# Altium PCB IMU V1.PcbDoc (part 1 of 2)
Units mm, origin at the board's own origin, x right, y up, seen from the top; angles counter-clockwise.
Board outline 100 x 100 mm, 2 copper layers (Top Layer, Bottom Layer); 99 components, 85 nets, 461 pads, 189 vias.
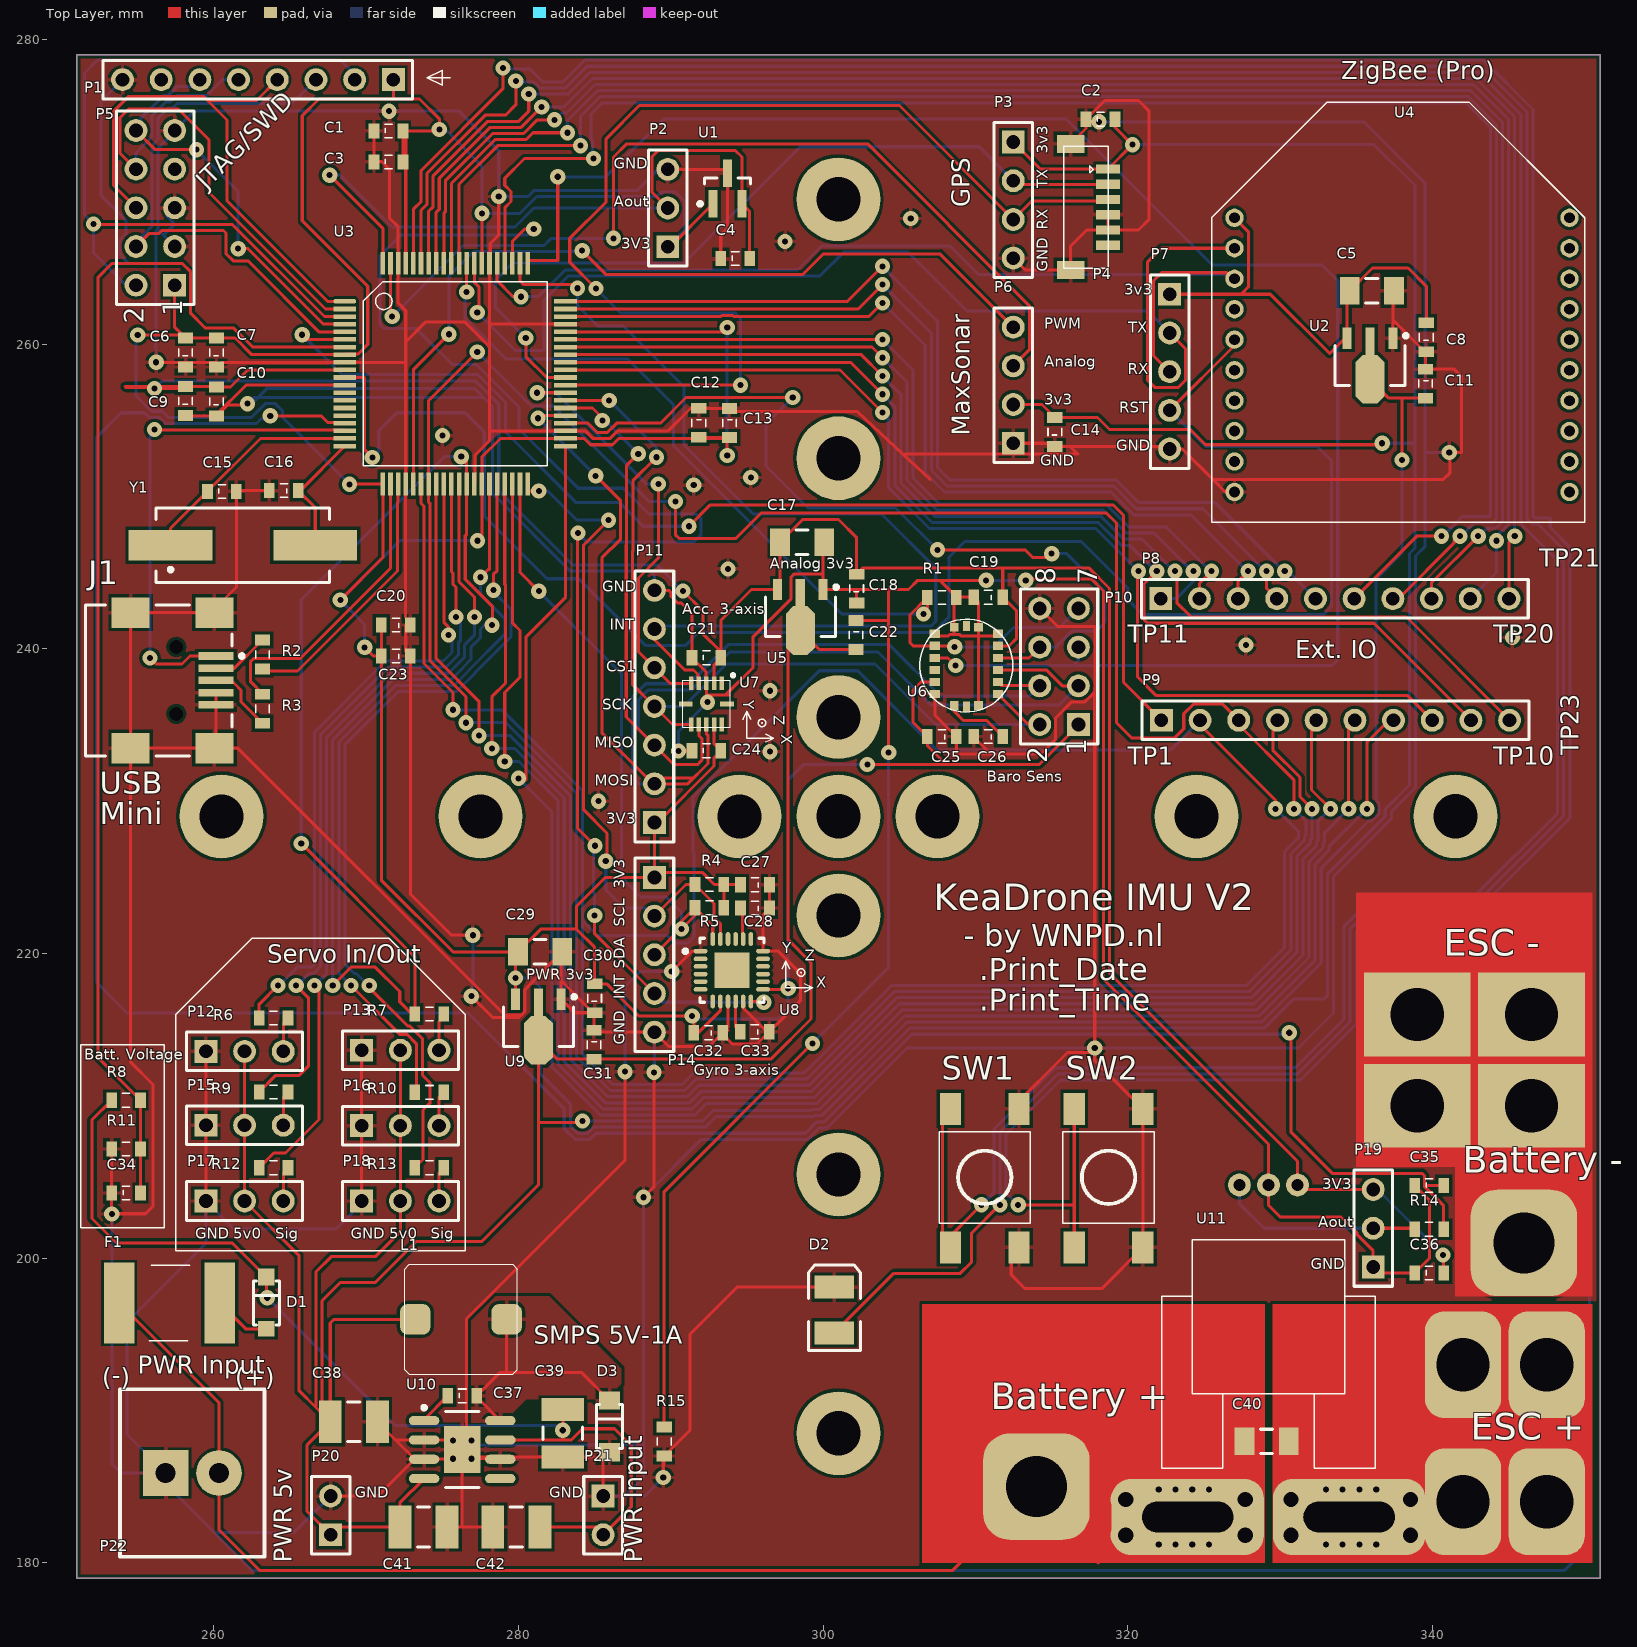
[diagram p0: Top Layer view]
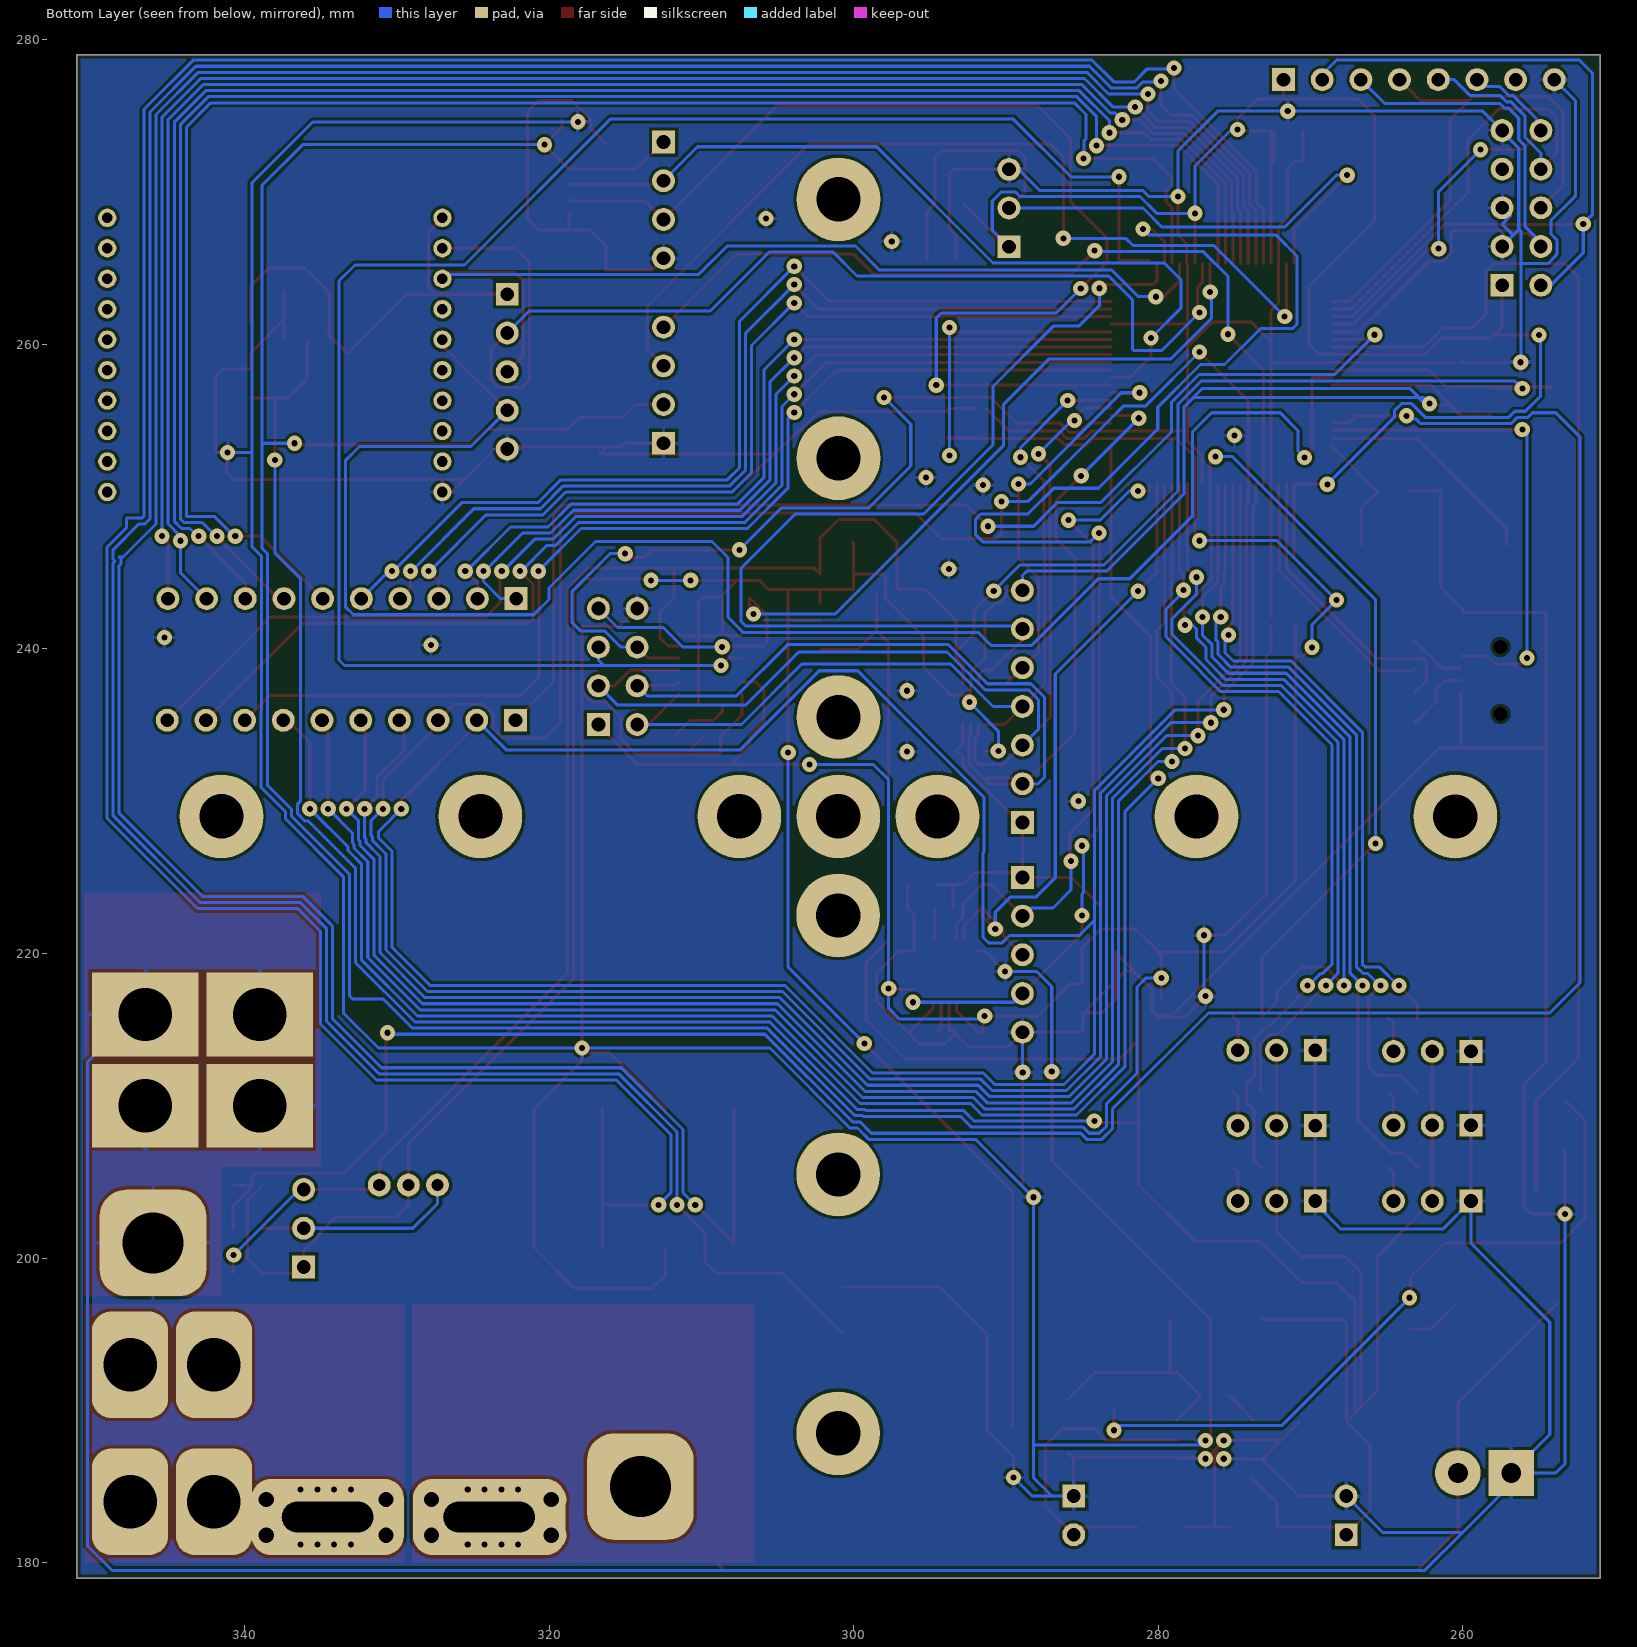
[diagram p1: Bottom Layer view, seen from below]
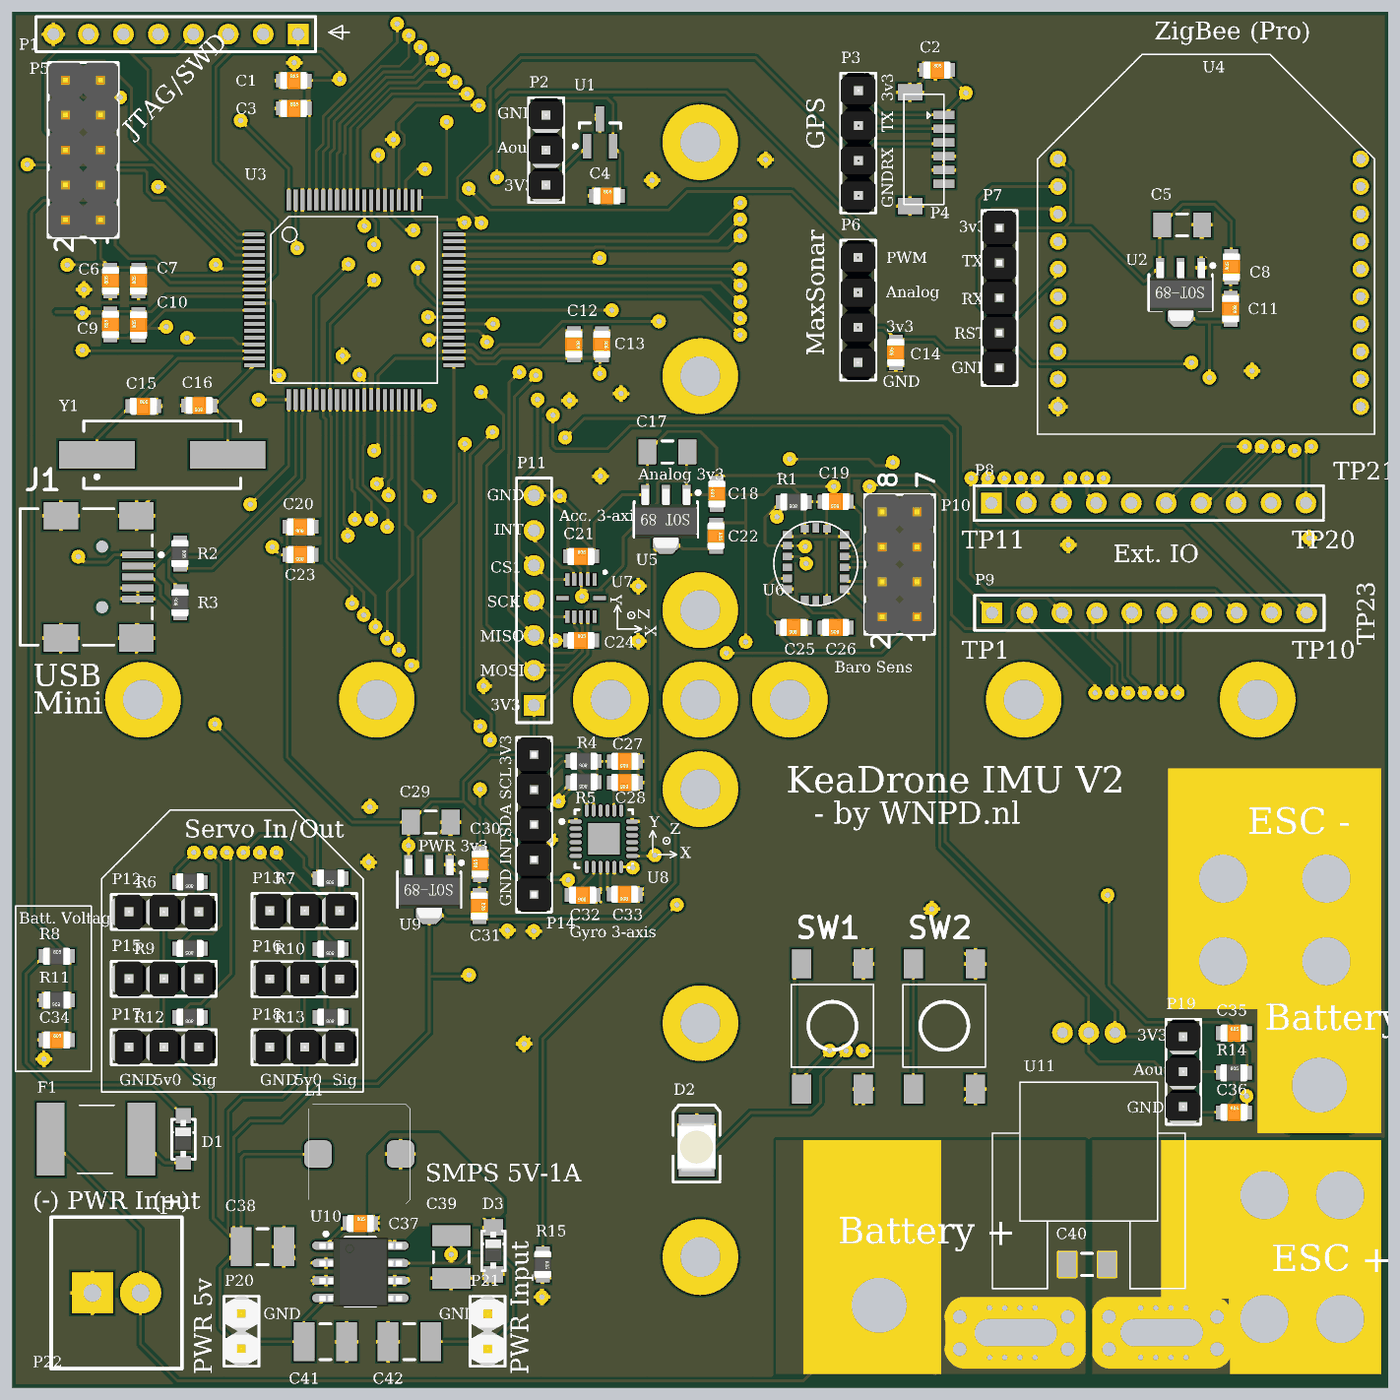
[diagram p3: 3D render of the assembled board from above, using the file's embedded part models]

## Layer stack, top to bottom
Top Layer: signal copper 0.0356
Dielectric: dielectric 0.32, FR-4, Dk 4.8
Bottom Layer: signal copper 0.0356

## Board outline
251,179 251,279 351,279 351,179

## Design rules (kind name [scope] priority, off if disabled: settings)
Clearance [All] p1: gap=0.2
DiffPairsRouting "Schematic Differential Pairs Routing" [InNet('V_USB_P')] p1: maxlimit=0.254 minlimit=0.2 mostfreqgap=0.2 maxuncoupledlength=12.7
DiffPairsRouting "Schematic Differential Pairs Routing_1" [InNet('V_USB_N')] p2: maxlimit=0.254 minlimit=0.2 mostfreqgap=0.2 maxuncoupledlength=12.7
DiffPairsRouting [All] p3: maxlimit=0.254 minlimit=0.254 mostfreqgap=0.254 maxuncoupledlength=12.7
FabricationTestpoint "Schematic Fabrication Testpoint Style_4" [InNet('JTAG_TDIX')] p1: side=1 testpointundercomponent=FALSE minsize=1 maxsize=2.54 preferedsize=1.5 minholesize=0 maxholesize=1.016 preferedholesize=0.813 testpointgrid=0.025 allowsidetop=TRUE usegrid=TRUE gridtolerance=0
FabricationTestpoint "Schematic Fabrication Testpoint Style_3" [InNet('JTAG_RESETX')] p2: side=1 testpointundercomponent=FALSE minsize=1 maxsize=2.54 preferedsize=1.5 minholesize=0 maxholesize=1.016 preferedholesize=0.813 testpointgrid=0.025 allowsidetop=TRUE usegrid=TRUE gridtolerance=0
FabricationTestpoint "Schematic Fabrication Testpoint Style_2" [InNet('JTAG_TCLK_SWCLKX')] p3: side=1 testpointundercomponent=FALSE minsize=1 maxsize=2.54 preferedsize=1.5 minholesize=0 maxholesize=1.016 preferedholesize=0.813 testpointgrid=0.025 allowsidetop=TRUE usegrid=TRUE gridtolerance=0
FabricationTestpoint "Schematic Fabrication Testpoint Style_1" [InNet('JTAG_TDO_SWOX')] p4: side=1 testpointundercomponent=FALSE minsize=1 maxsize=2.54 preferedsize=1.5 minholesize=0 maxholesize=1.016 preferedholesize=0.813 testpointgrid=0.025 allowsidetop=TRUE usegrid=TRUE gridtolerance=0
FabricationTestpoint "Schematic Fabrication Testpoint Style" [InNet('JTAG_TMS_SWDIOX')] p5: side=1 testpointundercomponent=FALSE minsize=1 maxsize=2.54 preferedsize=1.5 minholesize=0 maxholesize=1.016 preferedholesize=0.813 testpointgrid=0.025 allowsidetop=TRUE usegrid=TRUE gridtolerance=0
FabricationTestpoint [All] p6: side=3 testpointundercomponent=TRUE minsize=1.016 maxsize=2.54 preferedsize=1.524 minholesize=0 maxholesize=1.016 preferedholesize=0.813 testpointgrid=0.025 allowsidetop=TRUE allowsidebottom=TRUE usegrid=TRUE gridtolerance=0
HoleSize [All] p1: absolutevalues=TRUE maxlimit=6 minlimit=0.4 maxpercent=80.000 minpercent=20.000
HoleToHoleClearance [All] p1: gap=0.2 allowstackedmicrovias=TRUE
MinimumAnnularRing [All] p1: minimumring=0.1
MinimumSolderMaskSliver [All] p1: minsoldermaskwidth=0.2
PolygonConnect [All] p1: connectstyle=Relief reliefconductorwidth=0.254 reliefentries=4 polygonreliefangle="90 Angle"
RoomDefinition "U_Zigbee interface" [InComponentClass('U_Zigbee interface')] p1: confinementstyle=ConfineIn formatcopy=TRUE lockcomponents=FALSE outline 320.9,248.1 350.199,248.1 350.199,278.699 320.9,278.699
RoomDefinition "U_Test Pins" [InComponentClass('U_Test Pins')] p2 off: confinementstyle=ConfineIn formatcopy=TRUE lockcomponents=FALSE outline 219,236 240,236 240,251 219,251
RoomDefinition "U_Temperature sensor - TC1046VNBTR" [InComponentClass('U_Temperature sensor - TC1046VNBTR')] p3: confinementstyle=ConfineIn formatcopy=TRUE lockcomponents=FALSE outline 287.8,264 296.8,264 296.8,274 287.8,274
RoomDefinition "U_Subsheets combined" [InComponentClass('U_Subsheets combined')] p4 off: confinementstyle=ConfineIn formatcopy=TRUE lockcomponents=FALSE outline 221.8,175.3 228,175.3 228,181 221.8,181
RoomDefinition "U_Sensor current 100A" [InComponentClass('U_Sensor current 100A')] p5: confinementstyle=ConfineIn formatcopy=TRUE lockcomponents=FALSE outline 318.5,180 341.5,180 341.5,206.5 318.5,206.5
RoomDefinition "U_Pressure sensor - SCP1000-D01" [InComponentClass('U_Pressure sensor - SCP1000-D01')] p6: confinementstyle=ConfineIn formatcopy=TRUE lockcomponents=FALSE outline 304.5,232 319.5,232 319.5,245.5 304.5,245.5
RoomDefinition "U_LV-MaxSonar Connector" [InComponentClass('U_LV-MaxSonar Connector')] p7: confinementstyle=ConfineIn formatcopy=TRUE lockcomponents=FALSE outline 310.1,251.8 316.1,251.8 316.1,262.8 310.1,262.8
RoomDefinition "U_JTAG Connector" [InComponentClass('U_JTAG Connector')] p8: confinementstyle=ConfineIn formatcopy=TRUE lockcomponents=FALSE outline 252.376,275.744 252.376,278.992 273.404,278.992 273.404,275.744 259.048,275.744 259.048,260.878 253.26,260.878 253.26,275.744
RoomDefinition "U_GYRO 3-AXIS - ITG-3200" [InComponentClass('U_GYRO 3-AXIS - ITG-3200')] p9: confinementstyle=ConfineIn formatcopy=TRUE lockcomponents=FALSE outline 287,213 301,213 301,227 287,227
RoomDefinition "U_GPS Connector - LS20031" [InComponentClass('U_GPS Connector - LS20031')] p10: confinementstyle=ConfineIn formatcopy=TRUE lockcomponents=FALSE outline 310.8,263.9 319.9,263.9 319.9,275.7 310.8,275.7
RoomDefinition "U_Battery Voltage 12v Max" [InComponentClass('U_Battery Voltage 12v Max')] p11: confinementstyle=ConfineIn formatcopy=TRUE lockcomponents=FALSE outline 252.5,203 256,203 256,211.5 252.5,211.5
RoomDefinition "U_Accelerometer 3-AXIS - BMA180" [InComponentClass('U_Accelerometer 3-AXIS - BMA180')] p12: confinementstyle=ConfineIn formatcopy=TRUE lockcomponents=FALSE outline 287,226 299,226 299,246 287,246
RoomDefinition ServoConnector6 [InComponentClass('ServoConnector6')] p13: confinementstyle=ConfineIn formatcopy=TRUE lockcomponents=FALSE outline 268,206.85 268,202.05 276.5,202.05 276.5,206.85
RoomDefinition ServoConnector5 [InComponentClass('ServoConnector5')] p14: confinementstyle=ConfineIn formatcopy=TRUE lockcomponents=FALSE outline 268,211.8 268,207 276.5,207 276.5,211.8
RoomDefinition ServoConnector4 [InComponentClass('ServoConnector4')] p15: confinementstyle=ConfineIn formatcopy=TRUE lockcomponents=FALSE outline 268,216.75 268,211.95 276.5,211.95 276.5,216.75
RoomDefinition ServoConnector3 [InComponentClass('ServoConnector3')] p16: confinementstyle=ConfineIn formatcopy=TRUE lockcomponents=FALSE outline 257.775,206.85 257.775,202.05 266.275,202.05 266.275,206.85
RoomDefinition ServoConnector2 [InComponentClass('ServoConnector2')] p17: confinementstyle=ConfineIn formatcopy=TRUE lockcomponents=FALSE outline 257.775,211.825 257.775,207.025 266.275,207.025 266.275,211.825
RoomDefinition ServoConnector1 [InComponentClass('ServoConnector1')] p18: confinementstyle=ConfineIn formatcopy=TRUE lockcomponents=FALSE outline 257.775,216.675 257.775,211.875 266.275,211.875 266.275,216.675
RoomDefinition "PWR Entry" [InComponentClass('PWR Entry')] p19: confinementstyle=ConfineIn formatcopy=TRUE lockcomponents=FALSE outline 252,180 265.5,180 265.5,200 252,200
RoomDefinition "PSU 5v1A" [InComponentClass('PSU 5v1A')] p20: confinementstyle=ConfineIn formatcopy=TRUE lockcomponents=FALSE outline 266,180.1 288,180.1 288,199.9 266,199.9
RoomDefinition "PSU 3v3A" [InComponentClass('PSU 3v3A')] p21: confinementstyle=ConfineIn formatcopy=TRUE lockcomponents=FALSE outline 295.599,249 295.599,238.999 303.099,238.999 303.099,249
RoomDefinition "PSU 3v3-xBee" [InComponentClass('PSU 3v3-xBee')] p22: confinementstyle=ConfineIn formatcopy=TRUE lockcomponents=FALSE outline 333,265 333,255.5 340.5,255.5 340.5,265
RoomDefinition "PSU 3v3" [InComponentClass('PSU 3v3')] p23: confinementstyle=ConfineIn formatcopy=TRUE lockcomponents=FALSE outline 278.399,221.9 278.399,212.101 285.899,212.101 285.899,221.9
RoomDefinition main [InComponentClass('main')] p24: confinementstyle=ConfineIn formatcopy=TRUE lockcomponents=FALSE outline 254,238.6 294.8,238.6 294.8,274.9 254,274.9
RoutingPriority "Schematic Routing Priority_6" [InNet('NetC15_1')] p1: routingpriority=100
RoutingPriority "Schematic Routing Priority_5" [InNet('NetC16_1')] p2: routingpriority=100
RoutingPriority "Schematic Routing Priority_4" [InNet('JTAG_RESETX')] p3: routingpriority=99
RoutingPriority "Schematic Routing Priority_3" [InNet('JTAG_TDIX')] p4: routingpriority=99
RoutingPriority "Schematic Routing Priority_2" [InNet('JTAG_TCLK_SWCLKX')] p5: routingpriority=99
RoutingPriority "Schematic Routing Priority_1" [InNet('JTAG_TDO_SWOX')] p6: routingpriority=99
RoutingPriority "Schematic Routing Priority" [InNet('JTAG_TMS_SWDIOX')] p7: routingpriority=99
RoutingPriority [All] p8: routingpriority=0
RoutingVias [All] p1: holewidth=0.4 width=1 viastyle="Through Hole" minholewidth=0.4 minwidth=1 maxholewidth=1.4 maxwidth=2
SMDNeckDown [All] p1: percent=100.000
SilkToSilkClearance [All] p1: silktosilkclearance=0.2
SilkscreenOverComponentPads [All] p1 off: minsilkscreentomaskgap=0.254
SolderMaskExpansion [All] p1: expansion=0.102
Width [All] p1: maxlimit=2 minlimit=0.2 preferedwidth=0.2
20 further rules are at their usual default settings.

## Classes and differential pairs
component class "PSU 3v3-xBee": C5 C8 C11 U2
component class "PWR Entry": D1 F1 P22
net class TP[1..23]: TP1 TP2 TP3 TP4 TP5 TP6 TP7 TP8 TP9 TP10 TP11 TP12 TP13 TP14 TP15 TP16 TP17 TP18 TP19 TP20 TP21 TP22 TP23 TP24 TP25 TP26 TP27 TP28
component class "U_Test Pins": D2 J1 P8 P9 R2 R3 SW1 SW2
channel class "Regulator 3v3-250mA MCP1702": "PSU 3v3" "PSU 3v3-xBee" "PSU 3v3A"
net class SERVOSIG[1..6]: SERVOSIG1 SERVOSIG2 SERVOSIG3 SERVOSIG4 SERVOSIG5 SERVOSIG6
component class "U_JTAG Connector": P1 P3.2 P5
component class "PSU 3v3A": C17 C18 C22 U5
component class main: C1 C1.1 C2.1 C3 C3.1 C4.1 C5.1 C6 C6.1 C7 C7.1 C8.1 C9 C10 C12 C13 C15 C16 C20 C23 JP1 U1.1 U3 Y1 Y1.1
component class "PSU 3v3": C29 C30 C31 U9
component class "U_Sensor current 100A": C32.14 C33.14 C34.14 C35 C36 C40 P13.14 P19 R8.14 R14 U9.14 U11
component class ServoConnector2: P8.5 P15 R6.5 R9
component class ServoConnector3: P8.6 P17 R6.6 R12
component class ServoConnector4: P8.7 P13 R6.7 R7
component class ServoConnector5: P8.8 P16 R6.8 R10
component class ServoConnector6: P8.9 P18 R6.9 R13
channel class ServoConnector: ServoConnector1 ServoConnector2 ServoConnector3 ServoConnector4 ServoConnector5 ServoConnector6
component class ServoConnector1: P8..1 P12 R6 R6..1
component class "PSU 5v1A": C37 C38 C39 C41 C42 D3 L1 P20 P21 U10
component class "U_Accelerometer 3-AXIS - BMA180": C21 C24 P11 U7
component class "U_Battery Voltage 12v Max": C34 R8 R11
component class "U_GPS Connector - LS20031": C2 P3 P4
component class "U_GYRO 3-AXIS - ITG-3200": C27 C28 C32 C33 P14 R4 R5 U8
component class "U_LV-MaxSonar Connector": C14 P6
component class "U_Pressure sensor - SCP1000-D01": C19 C25 C26 P10 R1 U6
component class "U_Subsheets combined": R15
component class "U_Temperature sensor - TC1046VNBTR": C4 P2 U1
component class "U_Zigbee interface": P7 U4
differential pair V_USB: +V_USB_P -V_USB_N

## Components (designator, comment, footprint, x,y, rotation, side; value= is the part's Value field where it differs from the comment)
C1 "100n" C0805 271.464,274.028 r0 top (schematic designator C17)
C2 "100n" C0805 318.208,274.792 r0 top (schematic designator C28)
C3 "10n" C0805 271.464,271.996 r0 top (schematic designator C18)
C4 "100n" C0805 294.224,265.644 r0 top (schematic designator C27)
C5 "10uF" C1206 336.016,263.508 r180 top (schematic designator C31)
C6 "100n" C0805 258.116,259.456 r90 top (schematic designator C35)
C7 "10n" C0805 260.148,259.456 r90 top (schematic designator C36)
C8 "100n" C0805 339.572,260.46 r90 top (schematic designator C30)
C9 "100n" C0805 258.116,256.272 r90 top (schematic designator C7)
C10 "10n" C0805 260.148,256.24 r90 top (schematic designator C8)
C11 "100n" C0805 339.572,257.412 r270 top (schematic designator C29)
C12 "10n" C0805 291.852,254.836 r270 top (schematic designator C4)
C13 "100n" C0805 293.873,254.828 r270 top (schematic designator C3)
C14 "100n" C0805 315.184,254.24 r90 top (schematic designator C16)
C15 "18p" C0805 260.528,250.364 r0 top (schematic designator C1)
C16 "18p" C0805 264.592,250.364 r180 top (schematic designator C2)
C17 "10uF" C1206 298.615,247.007 r180 top (schematic designator C31)
C18 "100n" C0805 302.171,243.959 r90 top (schematic designator C30)
C19 "100n" C0805 310.84,243.368 r180 top
C20 "10n" C0805 271.944,241.54 r180 top (schematic designator C6)
C21 "22n" C0805 292.336,239.436 r0 top (schematic designator C9)
C22 "100n" C0805 302.171,240.911 r270 top (schematic designator C29)
C23 "100n" C0805 271.944,239.508 r180 top (schematic designator C5)
C24 "22n" C0805 292.336,233.34 r0 top (schematic designator C10)
C25 "470n" C0805 307.792,234.224 r180 top (schematic designator C20)
C26 "100n" C0805 310.84,234.224 r180 top (schematic designator C21)
C27 "100n" C0805 295.524,224.488 r180 top (schematic designator C15)
C28 "2n2" C0805 295.524,222.964 r180 top (schematic designator C14)
C29 "10uF" C1206 281.415,220.109 r180 top (schematic designator C31)
C30 "100n" C0805 284.971,217.061 r90 top
C31 "100n" C0805 284.971,214.013 r270 top (schematic designator C29)
C32 "10n" C0805 292.46,214.776 r180 top (schematic designator C12)
C33 "100n" C0805 295.508,214.836 r180 top (schematic designator C13)
C34 "100n" C0805 254.236,204.3 r0 top (schematic designator C11)
C35 "100n" C0805 339.784,204.796 r0 top (schematic designator C33)
C36 "100n" C0805 339.784,199.044 r0 top (schematic designator C34)
C37 "Very low ESR 100nF" C0805 276.3,190.984 r0 top (schematic designator C22)
C38 "Low ESR 10uF" C1210 269.188,189.252 r180 top (schematic designator C26)
C39 "Very low ESR 2u2" C1210 282.904,188.504 r90 top (schematic designator C23)
C40 "100nF" C1206 329.112,187.968 r180 top (schematic designator C32)
C41 "Low ESR 10uF" C1210 273.76,182.348 r180 top (schematic designator C25)
C42 "Very low ESR 2u2" C1210 279.856,182.348 r0 top (schematic designator C24)
D1 "PMEG4030ER" SOD123W 263.444,197.06 r90 top
D2 "" PLCC2 300.736,196.596 r90 top (schematic designator D3)
D3 "PMEG3020EH 3A" SOD123F 285.972,188.952 r90 top (schematic designator D2)
F1 "SMT 1.5A" F_2920L185 253.784,197.06 r0 top
J1 "USB" USBminiSMT 252.284,237.928 r180 top
L1 "inductor" Square_7.3x7.3x4.5 271.22,190.984 r90 top
P1 "Pin Header" PH1x8_2.54 271.78,277.368 r180 top (schematic designator P6)
P2 "Pin Header" PH1x3_2.54 289.8,266.4 r90 top (schematic designator P9)
P3 "Pin Header" PH1x4_2.54 312.48,273.272 r270 top (schematic designator P12)
P4 "GPS Connector" GPScon-BM06B-SRSS-TB 318.699,266.5 r90 top (schematic designator P11)
P5 "Pin Header" PH2x5_2.54 257.424,263.875 r90 top (schematic designator P3)
P6 "Pin Header" PH1x4_2.54 312.48,253.5 r90 top (schematic designator P4)
P7 "Pin Header" PH1x5_2.54 322.744,263.28 r270 top (schematic designator P10)
P8 "Pin Header" PH1x10_2.54 322.16,243.296 r0 top (schematic designator P17)
P9 "Pin Header" PH1x10_2.54 322.204,235.316 r0 top (schematic designator P16)
P10 "Pin Header" PH2x4_2.54 316.756,235.032 r90 top (schematic designator P7)
P11 "Pin Header" PH1x7_2.54 288.92,228.6 r90 top (schematic designator P1)
P12 "Pin Header" PH1x3_2.54 259.475,213.575 r0 top (schematic designator P8)
P13 "Pin Header" PH1x3_2.54 269.7,213.65 r0 top (schematic designator P8)
P14 "Pin Header" PH1x5_2.54 288.92,224.996 r270 top (schematic designator P2)
P15 "Pin Header" PH1x3_2.54 259.475,208.725 r0 top (schematic designator P8)
P16 "Pin Header" PH1x3_2.54 269.7,208.7 r0 top (schematic designator P8)
P17 "Pin Header" PH1x3_2.54 259.475,203.75 r0 top (schematic designator P8)
P18 "Pin Header" PH1x3_2.54 269.7,203.75 r0 top (schematic designator P8)
P19 "Pin Header" PH1x3_2.54 336.108,199.424 r90 top (schematic designator P13)
P20 "Pin Header" PH1x2_2.54 267.664,181.84 r90 top (schematic designator P15)
P21 "Pin Header" PH1x2_2.54 285.552,184.38 r270 top (schematic designator P14)
P22 "Terminal Block" TB2_3.5 256.832,185.892 r0 top (schematic designator P5)
R1 "RESISTOR" R0805 307.792,243.368 r180 top (schematic designator R5)
R2 "RESISTOR" R0805 263.192,239.628 r270 top (schematic designator R9)
R3 "RESISTOR" R0805 263.192,236.072 r90 top (schematic designator R10)
R4 "RESISTOR" R0805 292.532,224.532 r180 top
R5 "RESISTOR" R0805 292.532,223.008 r180 top (schematic designator R3)
R6 "RESISTOR" R0805 263.919,215.759 r180 top
R7 "RESISTOR" R0805 274.144,216.034 r180 top (schematic designator R6)
R8 "RESISTOR" R0805 254.236,210.364 r0 top (schematic designator R1)
R9 "RESISTOR" R0805 263.919,210.909 r180 top (schematic designator R6)
R10 "RESISTOR" R0805 274.144,210.884 r180 top (schematic designator R6)
R11 "RESISTOR" R0805 254.236,207.163 r180 top (schematic designator R2)
R12 "RESISTOR" R0805 263.919,205.934 r180 top (schematic designator R6)
R13 "RESISTOR" R0805 274.144,205.934 r180 top (schematic designator R6)
R14 "RESISTOR" R0805 339.784,201.9 r0 top (schematic designator R8)
R15 "RESISTOR" R0805 289.56,187.96 r270 top (schematic designator R7)
SW1 "SMT" "SWITCH TACT" 308.356,209.804 r0 top
SW2 "SMT" "SWITCH TACT" 316.484,209.804 r0 top
U1 "IC, Temperature (TC1046VNBTR)" SOT-23-NB3_M 293.716,270.216 r90 top (schematic designator U6)
U2 "MCP1702T-3302E/MB" SOT-89-MB3_N 335.899,258.601 r270 top (schematic designator U8)
U3 "ARM Cortex M3" LQFP80 275.844,258.064 r0 top (schematic designator U1)
U4 "Zigbee 2.4Ghz" Zigbee_maxstream 326.999,268.299 r0 top (schematic designator U7)
U5 "MCP1702T-3302E/MB" SOT-89-MB3_N 298.499,242.1 r270 top (schematic designator U8)
U6 "Pressure sensor (SCP1000-D01)" SCP1000-D01 309.399,238.9 r0 top (schematic designator U4)
U7 "Accelerometer 3-AXIS (BMA180)" BMA180 292.336,236.388 r270 top (schematic designator U2)
U8 "GYRO 3-AXIS (ITG-3200)" "QFN50P400X400-24V2M - GYRO 3axis" 294,218.9 r0 top (schematic designator U3)
U9 "MCP1702T-3302E/MB" SOT-89-MB3_N 281.299,215.201 r270 top (schematic designator U8)
U10 "LM22672MR-5.0" MRA08B_N 276.3,187.428 r0 top (schematic designator U5)
U11 "Current sensor 100A" unique-ACS758xCB 329.232,204.804 r180 top (schematic designator U9)
Y1 "12Mhz" HC49/4H_SMX 261.904,246.804 r0 top

## Footprints (in the part's own frame and the unit in brackets; to place one, negate y for a bottom-side part, rotate by r counter-clockwise, add the part's x,y. Pads: shape width x height; smd on the part's side, far side on the other; paste and mask are expansions set on the pad)
BMA180 [mm]
  rect 0.9x0.3 smd: 1(-1.35,1) 2(-1.35,0.5) 3(-1.35,0) 4(-1.35,-0.5) 5(-1.35,-1) 7(1.35,-1) 8(1.35,-0.5) 9(1.35,0) 10(1.35,0.5) 11(1.35,1)
  rect 0.32x0.9 smd: 6(0,-1.35) 12(0,1.35)
  silkscreen extent -1.95,-1.55 2.5,4.4, body extent -1.55,-1.55 1.55,1.55, height 1
C0805 [mm] "Chip Capacitor; Body 2.0 x 1.2 mm (LxW typ)"
  rect 0.7x1 smd: 1(-0.95,-0.025) 2(0.95,-0.025)
  silkscreen extent -0.25,-0.47 0.25,0.42, body extent -1,-0.65 1,0.6, height 0.78
C1206 [mm] "Chip Capacitor, Body 3.2x1.6mm, IPC Medium Density"
  rect 1.3x1.8 smd: 1(-1.45,0) 2(1.45,0)
  silkscreen extent -0.4,-0.8 0.4,0.8, body extent -1.7,-0.9 1.7,0.9, height 1.35
C1210 [mm] "Chip Capacitor, Body 3.2x2.5mm, IPC Low Density"
  rect 1.5x2.8 smd: 1(-1.55,0) 2(1.55,0)
  silkscreen extent -0.4,-1.3 0.4,1.3, body extent -1.7,-1.35 1.7,1.35, height 1.35
F_2920L185 [mm] "Fuses, 2920L185"
  rect 2x5.3 smd: 1(0,0) 2(6.6,0)
  silkscreen extent 1.97,-2.48 4.62,2.47, body extent -0.45,-2.63 7.05,2.6, height 1.25
GPScon-BM06B-SRSS-TB [mm] "Connector; SMT; pitch 1mm; SH Connector; Top Entrance"
  rect 1.2x1.8 smd: 0(-1.625,2.45) 0(6.65,2.45)
  rect 0.6x1.55 smd: A1(5,0) A2(4,0) A3(3,0) A4(2,0) A5(1,0) A6(0,0)
  silkscreen extent -1.5,0 6.5,2.9
HC49/4H_SMX [mm] "Quartz Crystal, SM; Body 13.4 (inc. leads) x 4.9 mm (LxW max)"
  rect 5.5x2 smd: 1(-4.75,0) 2(4.75,0)
  silkscreen extent -5.7,-2.45 5.7,2.45
LQFP80 [mm] "plastic low profile quad flat package; 80 leads; body 12 x 12 x 1.4 mm"
  oval 1.5x0.3 smd: 1(-7.25,4.75)
  rect 1.5x0.3 smd: 2(-7.25,4.25) 3(-7.25,3.75) 4(-7.25,3.25) 5(-7.25,2.75) 6(-7.25,2.25) 7(-7.25,1.75) 8(-7.25,1.25) 9(-7.25,0.75) 10(-7.25,0.25) 11(-7.25,-0.25) 12(-7.25,-0.75) 13(-7.25,-1.25) 14(-7.25,-1.75) 15(-7.25,-2.25) 16(-7.25,-2.75) 17(-7.25,-3.25) 18(-7.25,-3.75) 19(-7.25,-4.25) 20(-7.25,-4.75) 41(7.25,-4.75) 42(7.25,-4.25) 43(7.25,-3.75) 44(7.25,-3.25) 45(7.25,-2.75) 46(7.25,-2.25) 47(7.25,-1.75) 48(7.25,-1.25) 49(7.25,-0.75) 50(7.25,-0.25) 51(7.25,0.25) 52(7.25,0.75) 53(7.25,1.25) 54(7.25,1.75) 55(7.25,2.25) 56(7.25,2.75) 57(7.25,3.25) 58(7.25,3.75) 59(7.25,4.25) 60(7.25,4.75)
  rect 0.3x1.5 smd: 21(-4.75,-7.25) 22(-4.25,-7.25) 23(-3.75,-7.25) 24(-3.25,-7.25) 25(-2.75,-7.25) 26(-2.25,-7.25) 27(-1.75,-7.25) 28(-1.25,-7.25) 29(-0.75,-7.25) 30(-0.25,-7.25) 31(0.25,-7.25) 32(0.75,-7.25) 33(1.25,-7.25) 34(1.75,-7.25) 35(2.25,-7.25) 36(2.75,-7.25) 37(3.25,-7.25) 38(3.75,-7.25) 39(4.25,-7.25) 40(4.75,-7.25) 61(4.75,7.25) 62(4.25,7.25) 63(3.75,7.25) 64(3.25,7.25) 65(2.75,7.25) 66(2.25,7.25) 67(1.75,7.25) 68(1.25,7.25) 69(0.75,7.25) 70(0.25,7.25) 71(-0.25,7.25) 72(-0.75,7.25) 73(-1.25,7.25) 74(-1.75,7.25) 75(-2.25,7.25) 76(-2.75,7.25) 77(-3.25,7.25) 78(-3.75,7.25) 79(-4.25,7.25) 80(-4.75,7.25)
  silkscreen extent -6.05,-6.05 6.05,6.05, body extent -6.05,-6.05 6.05,6.05, height 1.6
MRA08B_N [mm] "SOIC, 8-Leads, Body 4.9x3.9mm, Pitch 1.27mm, Exposed Pad, IPC Medium Density"
  oval 2x0.6 smd: 1(-2.5,1.905) 2(-2.5,0.635) 3(-2.5,-0.635) 4(-2.5,-1.905) 5(2.5,-1.905) 6(2.5,-0.635) 7(2.5,0.635) 8(2.5,1.905)
  rect 2.41x3.1 smd: 9(0,0)
  silkscreen extent -2.62,-2.5 1.1,2.88, body extent -2.98,-2.52 3.03,2.48, height 1.75
PH1x2_2.54 [mm] "Connector; Header; 2 Position"
  rect 1.5x1.5 hole 0.9: 1(0,0)
  round 1.5 hole 0.9: 2(2.54,0)
  silkscreen extent -1.27,-1.27 3.81,1.27, body extent -1.27,-1.27 3.81,1.27, height 8.38
PH1x3_2.54 [mm] "Connector; Header; 3 Position"
  rect 1.5x1.5 hole 0.9: 1(0,0)
  round 1.5 hole 0.9: 2(2.54,0) 3(5.08,0)
  silkscreen extent -1.27,-1.27 6.35,1.27, body extent -1.27,-1.27 6.35,1.27, height 8.38
PH1x4_2.54 [mm] "Connector; Header; 4 Position"
  rect 1.5x1.5 hole 0.9: 1(0,0)
  round 1.5 hole 0.9: 2(2.54,0) 3(5.08,0) 4(7.62,0)
  silkscreen extent -1.27,-1.27 8.89,1.27, body extent -1.27,-1.27 8.89,1.27, height 8.38
PH1x5_2.54 [mm] "Connector; Header; 5 Position"
  rect 1.5x1.5 hole 0.9: 1(0,0)
  round 1.5 hole 0.9: 2(2.54,0) 3(5.08,0) 4(7.62,0) 5(10.16,0)
  silkscreen extent -1.27,-1.27 11.43,1.27, body extent -1.27,-1.25 11.43,1.25, height 8.52
PH1x7_2.54 [mm] "Connector; Header; 7 Position"
  rect 1.5x1.5 hole 0.9: 1(0,0)
  round 1.5 hole 0.9: 2(2.54,0) 3(5.08,0) 4(7.62,0) 5(10.16,0) 6(12.7,0) 7(15.24,0)
  silkscreen extent -1.27,-1.27 16.51,1.27
PH1x8_2.54 [mm] "Connector; Header; 8 Position"
  rect 1.5x1.5 hole 0.9: 1(0,0)
  round 1.5 hole 0.9: 2(2.54,0) 3(5.08,0) 4(7.62,0) 5(10.16,0) 6(12.7,0) 7(15.24,0) 8(17.78,0)
  silkscreen extent -1.27,-1.27 19.05,1.27
PH1x10_2.54 [mm] "Connector; Header; 10 Position"
  rect 1.5x1.5 hole 0.9: 1(0,0)
  round 1.5 hole 0.9: 2(2.54,0) 3(5.08,0) 4(7.62,0) 5(10.16,0) 6(12.7,0) 7(15.24,0) 8(17.78,0) 9(20.32,0) 10(22.86,0)
  silkscreen extent -1.27,-1.27 24.13,1.27
PH2x4_2.54 [mm] "Connector; Header; 4x2 Position"
  rect 1.5x1.5 hole 0.9: 1(0,0)
  round 1.5 hole 0.9: 2(0,2.54) 3(2.54,0) 4(2.54,2.54) 5(5.08,0) 6(5.08,2.54) 7(7.62,0) 8(7.62,2.54)
  silkscreen extent -1.27,-1.27 8.89,3.81, body extent -1.27,-1.27 8.89,3.81, height 10.1
PH2x5_2.54 [mm] "Connector; Header; 5x2 Position"
  rect 1.5x1.5 hole 0.9: 1(0,0)
  round 1.5 hole 0.9: 2(0,2.54) 3(2.54,0) 4(2.54,2.54) 5(5.08,0) 6(5.08,2.54) 7(7.62,0) 8(7.62,2.54) 9(10.16,0) 10(10.16,2.54)
  silkscreen extent -1.27,-1.27 11.43,3.81, body extent -1.27,-1.27 11.43,3.81, height 10.1
PLCC2 [mm] "SM LED; 2 C-Bend Leads; Body 3.5 x 2.8 x 1.9 mm, inc leads (LxWxH typ)"
  rect 1.5x2.6 smd: 1(-1.5,0) 2(1.5,0)
  silkscreen extent -2.65,-1.7 2.95,1.7, body extent -1.85,-1.4 1.64,1.4, height 1.55
"QFN50P400X400-24V2M - GYRO 3axis" [mm] "QFN, 24-Leads, Body 4x4mm, Pitch 0.5mm, IPC Low Density"
  oval 0.9x0.3 smd: 1(-2.05,1.25) 2(-2.05,0.75) 3(-2.05,0.25) 4(-2.05,-0.25) 5(-2.05,-0.75) 6(-2.05,-1.25) 13(2.05,-1.25) 14(2.05,-0.75) 15(2.05,-0.25) 16(2.05,0.25) 17(2.05,0.75) 18(2.05,1.25)
  oval 0.3x0.9 smd: 7(-1.25,-2.05) 8(-0.75,-2.05) 9(-0.25,-2.05) 10(0.25,-2.05) 11(0.75,-2.05) 12(1.25,-2.05) 19(1.25,2.05) 20(0.75,2.05) 21(0.25,2.05) 22(-0.25,2.05) 23(-0.75,2.05) 24(-1.25,2.05)
  rect 2.3x2.3 smd: 25(0,0)
  silkscreen extent -3.17,-2.1 5.3,2.1, body extent -2.07,-2.07 2.07,2.07, height 1
R0805 [mm] "0805 SMD Resistor"
  rect 0.7x1 smd: 1(-0.95,0) 2(0.95,0)
  silkscreen extent -0.25,-0.45 0.25,0.45, body extent -1.01,-0.63 0.99,0.62, height 0.78
SCP1000-D01 [mm] "Pressure sensor"
  rect 0.67x0.55 smd: 1(-2.07,2.083) 2(-2.07,1.293) 3(-2.07,0.504) 4(-2.07,-0.286) 5(-2.07,-1.076) 6(-2.07,-1.865) 9(2.071,-1.865) 10(2.071,-1.076) 11(2.071,-0.286) 12(2.071,0.504) 13(2.071,1.293) 14(2.071,2.083)
  rect 0.57x0.57 smd: 7(-0.8,-2.615) 8(0.8,-2.615) 15(0.8,2.515) 16(-0.8,2.515)
  rect 0.47x0.67 smd: 20(0,2.594) 21(0,-2.694)
  silkscreen extent -3.05,-3.05 3.05,3.05, body extent -3.06,-3.06 3.06,3.06, height 1.7
SOD123F [mm] "SOD-123; 2 Leads; Body 2.7 x 1.6 mm, (LxW)"
  rect 1.2x1.4 smd: 1(-1.7,0) 2(1.7,0)
  silkscreen extent -1.45,-0.85 1.45,0.85, body extent -1.3,-0.66 1.4,0.69, height 0.79
SOD123W [mm] "SOD-123; 2 Leads; Body 2.7 x 1.6 mm, (LxW)"
  rect 1x1.1 smd: 1(-1.7,0)
  rect 1.1x1.1 smd: 2(1.7,0)
  silkscreen extent -1.45,-0.85 1.45,0.85, body extent -1.3,-0.66 1.4,0.69, height 0.79
SOT-23-NB3_M [mm] "SOT23, 3-Leads, Body 2.9x1.3mm, Pitch 0.95mm, Lead Span 2.4mm, IPC Low Density"
  rect 1.8x0.6 smd: 1(-1,0.95) 2(-1,-0.95) 3(1,0)
  silkscreen extent -1.12,-1.5 0.7,1.92, body extent -0.7,-1.5 0.7,1.5, height 1.12
SOT-89-MB3_N [mm] "SOT89, 3-Leads, Body 4.5x2.4 mm, Pitch 1.5mm, Lead Span 4.1mm, IPC Medium Density"
  rect 1.4x0.6 smd: 1(-1.8,1.5) 3(-1.8,-1.5)
  rect 1.8x0.6 smd: 2(-1.6,0)
  oct 3.2x1.9 smd: 2(0.9,0)
  silkscreen extent -2.07,-2.3 1.3,2.48, body extent -2.22,-2.23 2.08,2.27, height 1.51
Square_7.3x7.3x4.5 [mm]
  rrect50% 2x2 smd: 1(5,-8) 2(5,-2)
  silkscreen extent 1.4,-8.7 8.6,-1.3
"SWITCH TACT" [mm] "Switch, Tactile"
  rect 1.4x2.1 smd: 1(0,0) 2(4.5,0) 3(4.5,-9.1) 4(0,-9.1)
  silkscreen extent -0.75,-7.5 5.25,-1.5, body extent -0.75,-7.5 5.25,-1.5, height 4.23
TB2_3.5 [mm] "Terminal Block 2 Pin 3.5mm"
  rect 3x3 hole 1.3: 1(0,0)
  round 3 hole 1.3: 2(3.5,0)
  silkscreen extent -3,-5.5 6.5,5.5, body extent -3,-5.5 6.5,5.5, height 12.8
unique-ACS758xCB [mm] "Sensor, Package CB, 5-pin package, leadform PFF"
  round 1.5 hole 0.8: 1(-1.91,0) 2(0,0) 3(1.91,0)
  rrect50% 10x5 hole 2 slot 6 at 0 deg: 4(5.3,21.8) 5(-5.3,21.8)
  silkscreen extent -7,3.6 7,18.6, body extent -7,3.6 7,18.6, height 7
USBminiSMT [mm] "USB, Connector; USB2.0, Type B, SM; 5 Position; Right Angle"
  rect 2.3x0.5 smd: 1(-7.85,-1.6) 2(-7.85,-0.8) 3(-7.85,0) 4(-7.85,0.8) 5(-7.85,1.6)
  rect 2.5x2 smd: 6(-7.75,4.45) 7(-2.25,4.45) 8(-7.75,-4.45) 9(-2.25,-4.45)
  round 0.6 hole 0.9 unplated: MH1(-5.25,2.2) MH2(-5.25,-2.2)
  silkscreen extent -9.68,-4.95 0.7,4.95
Zigbee_maxstream [mm] "XBee 1mW Chip Antenna"
  round 1.2 hole 0.7: 1(0,0) 2(0,-2) 3(0,-4) 4(0,-6) 5(0,-8) 6(0,-10) 7(0,-12) 8(0,-14) 9(0,-16) 10(0,-18) 11(22,-18) 12(22,-16) 13(22,-14) 14(22,-12) 15(22,-10) 16(22,-8) 17(22,-6) 18(22,-4) 19(22,-2) 20(22,0)
  silkscreen extent -1.5,-20 23,7.6, body extent -1.5,-20 23,7.6, height 6

## Part data
C37: library part 0.01uF-0805-X7R
C38 C41: library part 10uF-1210-X5R
C39 C42: library part 2.2uF-1210-X7R
C40: library part 0.1uF
D2: library part Green-PLCC2, "LED, Surface Mount LED Indicator"
D3: library part PMEG3020EH
F1: library part 2920L185, "Fuse"
J1: library part USBmini, "USBmini 2.0, Right Angle, SMT, B Type, Receptacle, 5 Position, Black"
L1: library part 15uH-Shield-1.6A-Wurth, "Inductor"
P1: library part PH1x8, "Con1x8"
P2 P12 P13 P15 P16 P17 P18 P19: library part PH1x3, "Con1x3"
P3 P6: library part PH1x4, "Con1x4"
P4: library part GPS-LS20031, "Header, 6-Pin; GPS; 1mm pitch; SMT; SH connector; Crimp"
P5: library part PH2x5, "Header, 5-Pin, Dual row"
P7 P14: library part PH1x5, "Con1x5"
P8 P9: library part PH1x10, "Con1x10"
P10: library part PH2x4, "Header, 4-Pin, Dual row"
P11: library part PH1x7, "Con1x7"
P20 P21: library part PH1x2, "Con1x2"
P22: library part TB2, "Con1x2"
R1: library part 10K, "Resistor"
R2 R3: library part 33R, "Resistor"
R4 R5: library part 4K7, "Resistor"
R6 R7 R9 R10 R12 R13: library part 100R, "Resistor"
R8: library part 100K, "Resistor"
R11: library part 22K, "Resistor"
R14: library part 1K, "Resistor"
R15: library part 1R, "Resistor"
SW1 SW2: library part "Pushbutton TACT", "Switch"
U1: library part TC1046VNBTR, "High Precision Temperature-to-Voltage Converter, 3-Pin SOT-23, Extended Temperature, Tape and Reel"
U2 U5 U9: "Power, 250 mA Low Quiescent Current LDO Regulator, 3-Pin SOT-89, Extended Temperature, Tape and Reel"
U3: library part LPC175x
U4: library part Zigbee-WRL-08690, "Wireless, zigbee module from Maxstream;"
U6: library part SCP1000-D01
U7: library part BMA180
U8: library part ITG-3200, "Gyro, 3-axis"
U10: library part LM22674MR-5.0, "Power, 500mA SIMPLE SWITCHER, Step-Down Voltage Regulator with Precision Enable"
U11: library part ACS758xCB, "Sensor, Current"
Y1: library part HC49SM-12, "Crystal Oscillator"

## Free pads (board coordinates)
  rrect50% 7x7 hole 4: 0(314,185) 0(346,201)
  rrect50% 5x7 hole 3.5: 1(342,184) 1(347.5,184) 2(342,193) 2(347.5,193)
  round 5.5 hole 2.9 unplated: 2(260.5,229) 2(277.5,229) 2(294.5,229) 2(301,235.514) 2(301,252.514) 2(301,269.514) 2(301.014,188.5) 2(301.014,205.5) 2(301.014,222.5) 2(307.507,229.007) 2(324.507,229.007) 2(341.507,229.007) 4(301.007,229.007)
  rect 7x5.5 hole 3.5: 2(339,210) 2(339,216) 2(346.5,216) 2(346.5,210)

## Via types
v1: diameter 1, hole 0.4, Top Layer to Bottom Layer, 177 vias
v2: diameter 2, hole 1, Top Layer to Bottom Layer, 8 vias
v3: diameter 1, hole 0.4, Top Layer to Bottom Layer, tented top, 4 vias

## Nets (pads, with @x,y where several pads share a name; then routed paths per layer and width w, separated by ;. In a path a pad name is that pad's centre, name@x,y a point inside that pad or via, vN(x,y) a via of type N, cw(c..) or ccw(c..) an arc to the next point about the centre after c; other vN are vias at no path point)
3V3-ZIGBEE: C5.2 C8.2 P7.1 U2.3 U4.1 | length 31.4
  Top Layer w0.2: P7.1@322.744,263.28 327.44,263.28 ; U4.1@326.999,268.299 327.914,267.385 327.914,263.754 327.44,263.28 ; U2.3@334.399,260.401 334.399,263.341 334.566,263.341 C5.2@334.566,263.508 336.057,264.999 338.401,264.999 339.597,263.803 C8.2@339.597,261.41 ; U2.3@334.566,260.703 334.399,260.536 334.332,260.468 333.248,259.385 329.353,263.28 327.44,263.28
3V3A: C9.2 C10.2 C17.2 C18.2 C19.1 C21.2 C36.2 P19.3 U3.10 U5.3 U6.13 U7.2 U11.1 | length 171.7
  Top Layer w0.2: v1(256.1,257.1) 258.019,257.1 C9.2@258.141,257.222 254.174,257.222 254.246,257.15 258.069,257.15 258.229,257.15 258.301,257.222 260.045,257.222 260.077,257.19 C10.2@260.173,257.19 261.09,257.19 262.214,258.314 U3.10@268.594,258.314 ; v1(290.8,243.8) 292.1,242.5 292.1,241 C21.2@293.286,239.814 ; U7.2@292.836,237.738 292.836,238.961 C21.2@293.286,239.411 C21.2@293.286,239.814 ; 299.1,248.499 298.657,248.499 ; U6.13@311.47,240.193 312.193,240.193 312.7,240.7 312.7,242.483 C19.1@311.79,243.393 311.79,245.3 ; P19.3@336.108,204.504 331.442,204.504 U11.1@331.142,204.804 331.142,206.358 318.8,218.7 318.8,243.966 317.466,245.3 311.79,245.3 ; v1(340.7,200.2) 340.734,200.166 C36.2@340.734,199.019 ; C21.2@293.286,239.814 293.286,241.886 295.3,243.9 U5.3@296.999,243.9 297.165,244.067 C17.2@297.165,247.007 298.657,248.499 ; 298.657,248.499 301,248.499 302.196,247.302 C18.2@302.196,244.909 302.587,245.3 311.79,245.3
  Bottom Layer w0.2: v1(256.1,257.1) 256.6,257.6 277.166,257.6 278.7,256.066 278.7,250.366 283.566,245.5 289.1,245.5 v1(290.8,243.8) ; P19.3@336.108,204.504 336.396,204.504 v1(340.7,200.2)
5V0: C11.2 C22.2 C31.2 C38.2 C41.2 L1.2 P12.2 P13.2 P15.2 P16.2 P17.2 P18.2 P20.1 U2.2 U5.2 U9.2 U10.4 | length 274.9
  Top Layer w0.2: P12.2@262.015,213.575 P15.2@262.015,208.725 P17.2@262.015,203.75 265.6,200.165 265.6,191.29 266.7,190.19 ; P13.2@272.24,213.65 P18.2@272.24,203.75 272.24,201.74 270.6,200.1 267.7,200.1 266.7,199.1 266.7,190.19 ; L1.2@273.22,195.984 267.884,195.984 267.638,195.738 C38.2@267.638,189.252 ; U10.4@273.8,185.523 272.21,183.933 C41.2@272.21,182.348 268.172,182.348 P20.1@267.664,181.84 266.1,183.404 266.1,187.714 C38.2@267.638,189.252 ; U9.2@281.299,216.801 U9.2@281.299,214.301 ; v1(284.2,209) 284.1,208.9 281.299,208.9 ; U5.2@298.499,243.7 U5.2@298.499,241.2 ; C22.2@302.146,239.961 299.737,239.961 U5.2@298.499,241.2 ; U2.2@335.899,260.201 U2.2@335.899,257.701 337.138,256.462 337.999,256.462 ; v1(338,252.4) 337.999,256.462 ; C11.2@339.547,256.462 337.999,256.462 ; 266.7,190.19 C38.2@267.1,189.79 ; C38.2@267.1,189.79 267.1,197.2 268.3,198.4 270.6,198.4 273.3,201.1 277.6,201.1 281.299,204.799 281.299,208.9 ; C38.2@267.1,189.79 C38.2@267.638,189.252 ; 281.299,208.9 U9.2@281.299,214.301 ; U9.2@281.299,214.301 282.538,213.063 C31.2@284.946,213.063 296.563,213.063 299.2,215.7 299.2,219.4 297.7,220.9 297.7,240.401 U5.2@298.499,241.2
  Bottom Layer w0.2: v1(284.2,209) 292.1,209 292.8,209.7 299.203,209.7 299.253,209.75 299.75,209.75 305.5,215.5 328.8,215.5 332.7,219.4 332.7,225.6 335.8,228.7 336.031,228.7 336.5,229.169 336.5,229.831 336.3,230.031 336.3,244.6 338,246.3 v1(338,252.4)
11V1-UF: C40.2 F1.1 P22.2 pad.0@314,185 U11.4 | length 77.2
  Top Layer w0.2: F1.1@253.784,197.06 260.332,190.512 P22.2@260.332,185.892 260.332,182.168 263,179.5 308.5,179.5 pad.0@314,185 ; 318.053,180 v2(319.857,181.804)
  other v1: 322.032,181.204 323.132,181.204 324.232,181.204 325.332,181.204 322.032,184.804 323.132,184.804 324.232,184.804 325.332,184.804
  other v2: 327.707,181.804 319.857,184.154 327.707,184.154
AOUT: P19.2 R14.1 U11.3 | length 13.4
  Top Layer w0.2: P19.2@336.108,201.964 338.77,201.964 R14.1@338.834,201.9
  Bottom Layer w0.2: U11.3@327.322,204.804 327.322,203.578 328.936,201.964 P19.2@336.108,201.964
"BATTERY VOLTAGE": C34.2 R8.2 R11.1 U3.7 | length 81.7
  Top Layer w0.2: C34.2@255.186,204.275 R11.1@255.186,207.163 R8.2@255.186,210.364 252.4,213.15 252.4,264.4 253.3,265.3 257.923,265.3 258.474,264.749 258.474,262.026 259.444,261.056 261.31,261.056 262.552,259.814 U3.7@268.594,259.814
CS0: P10.6 U3.44 U6.12 | length 57.4
  Top Layer w0.2: U3.44@283.094,254.814 284.554,254.814 285.168,254.199 285.831,254.199 286.445,254.814 289.314,254.814 291,256.5 v1(298,256.5) ; v1(307.5,246.5) 313.25,246.5 313.75,246 315,246 v1(315,246.25) ; U6.12@311.47,239.403 313.507,239.403 P10.6@314.216,240.112
  Bottom Layer w0.2: v1(298,256.5) 296.25,254.75 296.25,252 299,249.25 304.75,249.25 v1(307.5,246.5) ; P10.6@314.216,240.112 315.271,240.112 316.321,241.162 317.912,241.162 318.5,241.75 318.5,243.75 316,246.25 v1(315,246.25)
CS1: P11.5 U3.48 U7.5 | length 28.2
  Top Layer w0.2: v1(281.222,256.814) U3.48@283.094,256.814 ; v1(289.179,250.816) 289.179,245.962 287.87,244.653 287.87,239.81 P11.5@288.92,238.76 289.942,237.738 U7.5@291.336,237.738
  Bottom Layer w0.2: v1(281.222,256.814) 282.428,256.814 288.426,250.816 v1(289.179,250.816)
"CURRENT VIOUT": C35.2 R14.2 U3.17 | length 161.2
  Top Layer w0.2: v1(263.7,255.3) 267.034,255.3 267.47,254.864 268.544,254.864 U3.17@268.594,254.814 ; v1@330.705,214.8 330.705,208.295 333.429,205.571 339.308,205.571 339.484,205.395 339.484,204.687 ; R14.2@340.734,201.9 340.734,203.437 339.484,204.687 ; C35.2@340.734,204.771 339.568,204.771 339.484,204.687
  Bottom Layer w0.2: v1@263.7,255.1 263.097,255.1 262.797,254.799 256.832,254.799 256.431,255.2 255.734,255.2 255.434,255.5 253.9,255.5 252.3,253.9 252.3,218.1 254.3,216.1 276.7,216.1 283,209.8 283,208.503 283.703,207.8 284.697,207.8 285.097,208.2 298.835,208.2 299.585,208.95 300.081,208.95 305.831,214.7 v1@330.5,214.7
  other v1: 330.6,214.8
"DISTANCE ANALOG": P6.3 U3.79 | length 62
  Top Layer w0.2: U3.79@271.594,265.314 271.594,261.933 v1(271.704,261.823) ; v1(286.233,266.954) 286.233,272.288 287.096,273.152 302.92,273.152 313.538,262.534 313.538,259.637 P6.3@312.48,258.58
  Bottom Layer w0.2: v1(271.704,261.823) 276.358,266.477 281.667,266.477 282.143,266.954 v1(286.233,266.954)
"DISTANCE PWM": P6.4 U3.25 | length 55.6
  Top Layer w0.2: U3.25@273.094,250.814 273.094,258.324 v1(275.425,260.655) ; v1(284.175,266.141) 285.725,264.592 298.679,264.592 300.025,265.938 307.662,265.938 P6.4@312.48,261.12
  Bottom Layer w0.2: v1(275.425,260.655) 275.425,264.46 277.043,266.077 284.111,266.077 v1(284.175,266.141)
EXT_PWR?: P1.7
GNDA: C9.1 C10.1 C17.1 C18.1 C19.2 C21.1 C22.1 C24.1 C35.1 C36.1 P11.7 P19.1 R1.1 R15.1 U3.12 U5.1 U6.1 U6.8 U6.14 U6.15 U6.16 U7.3 U11.2 | length 262.2
  Top Layer w0.2: C9.1@258.141,255.322 258.333,255.322 258.333,255.29 C10.1@260.077,255.29 ; 259.378,255.322 C10.1@260.081,255.294 ; v1@262.101,256.007 v1@262.095,256 ; v1(262.199,256.1) v1@262.299,256 ; v1@262.3,255.999 v1@262.399,255.999 ; v1@262.4,256 v1@262.299,256 ; U3.12@268.594,257.314 262.101,257.314 C10.1@260.125,255.338 ; P11.7@288.92,243.84 289.86,243.84 290,243.7 290,243.469 290.469,243 290.7,243 291.386,242.314 C21.1@291.386,239.411 292.336,238.461 ; R15.1@289.56,188.91 289.56,204.36 v1(299.3,214.1) ; v1(290.5,233.3) 291.371,233.3 C24.1@291.386,233.315 ; U7.3@292.303,237.738 292.303,238.494 ; v1@292.336,236.636 U7.3@292.336,237.738 ; v1@292.4,236.982 293.827,236.982 ; 293.61,236.988 295.4,238.778 295.4,240.801 297.899,243.3 297.899,244.724 298.075,244.9 299.899,244.9 ; C17.1@300.065,247.007 299.999,246.941 U5.1@299.999,243.9 302.3,243.9 ; C22.1@302.146,241.861 304.261,241.861 304.3,241.9 ; C18.1@302.196,243.009 302.196,243.797 302.3,243.9 ; v1(304.3,233.2) 304.3,243.9 ; U6.1@307.329,240.983 307.453,240.858 308.227,240.858 308.302,240.934 308.965,240.934 309.04,240.858 310.199,240.858 ; 308.599,240.959 U6.16@308.599,241.415 R1.1@308.599,243.225 ; U6.8@310.199,236.285 310.199,240.858 ; v1(310.7,244.5) 307.66,244.5 ; U6.14@311.47,240.983 311.346,240.858 310.199,240.858 ; v1@313.3,244.6 317.6,244.6 318.4,243.8 318.4,218.3 329.232,207.468 U11.2@329.232,204.804 329.232,203.468 330,202.7 334,202.7 335.058,201.642 335.058,201.529 336.108,200.479 P19.1@336.108,199.424 336.513,199.019 C36.1@338.834,199.019 339.8,199.985 339.8,203.805 C35.1@338.834,204.771 ; C10.1@260.077,255.29 C10.1@260.081,255.294 ; C10.1@260.077,255.29 C10.1@260.125,255.338 ; C10.1@260.081,255.294 C10.1@260.173,255.29 260.883,256 ; C10.1@260.081,255.294 C10.1@260.125,255.338 ; 260.883,256 v1@262.095,256 ; 260.883,256 v1@262.199,256 ; v1@262.095,256 v1@262.199,256 ; v1@262.199,256 v1@262.299,256 ; 302.3,243.9 304.3,243.9 ; 304.3,243.9 305.6,243.9 306.2,244.5 307.66,244.5 ; 307.66,244.5 308.767,243.393 C19.2@309.89,243.393 310.199,243.084 U6.15@310.199,241.415 310.199,240.858
  Bottom Layer w0.2: v1@262.101,256.007 262.595,256.5 277.7,256.5 ; v1(262.199,256.1) 262.3,255.999 262.399,255.999 263.5,257.1 277.1,257.1 278.3,255.9 278.3,250.2 283.4,245.1 288.634,245.1 288.92,244.814 P11.7@288.92,243.84 ; v1(290.5,233.3) 290.5,234.6 v1(292.4,236.5) ; v1(299.3,214.1) 304.3,219.1 v1(304.3,233.2) ; v1(310.7,244.5) v1(313.3,244.5)
"GPS - MISO": P3.3 P4.A3 U3.49 | length 75.2
  Top Layer w0.2: U3.49@283.094,257.314 v1(294.576,257.314) ; v1(285.09,263.652) 283.362,265.379 283.362,266.954 285.75,269.342 285.75,273.482 287.934,275.666 305.006,275.666 P3.3@312.48,268.192 313.688,269.4 318.6,269.4 P4.A3@318.699,269.5
  Bottom Layer w0.2: v1(285.09,263.652) 286.69,262.052 294.246,262.052 294.576,261.722 v1(294.576,257.314)
"GPS - MOSI": P3.2 P4.A2 U3.50 | length 53.9
  Top Layer w0.2: v1(280.475,260.405) 280.475,259.186 281.847,257.814 U3.50@283.094,257.814 ; P3.2@312.48,270.732 312.7,270.732 312.932,270.5 P4.A2@318.699,270.5
  Bottom Layer w0.2: v1(280.475,260.405) 278.494,262.386 278.494,264.219 279.603,265.328 290.855,265.328 298.491,272.964 310.248,272.964 P3.2@312.48,270.732
"INPUT 11.1V": C39.2 C42.2 D1.2 P21.2 R8.1 U10.7 | length 68.1
  Top Layer w0.2: R8.1@253.286,210.364 252,209.078 252,202.6 253.6,201 261.204,201 D1.2@263.444,198.76 263.444,197.456 v1(263.5,197.4) ; U10.7@278.8,188.063 283,188.063 ; C42.2@281.406,182.348 285.044,182.348 P21.2@285.552,181.84 287.4,183.688 287.4,187.7 286.3,188.8 284.2,188.8 283.463,188.063 283,188.063 ; C39.2@282.904,190.054 282.904,188.159 283,188.063
  Bottom Layer w0.2: v1(263.5,197.4) 271.9,189 282.6,189 v1(282.9,188.7)
INT0: P10.5 U3.61 U6.3 | length 117.9
  Top Layer w0.2: U3.61@280.594,265.314 280.594,265.506 282.575,265.506 v1(282.575,270.993) ; U6.3@307.329,239.403 308.197,239.403 v1(308.7,238.9)
  Bottom Layer w0.2: v1(282.575,270.993) 285.733,270.993 289.518,274.777 315.976,274.777 325.552,265.201 332.74,265.201 333.781,264.16 333.781,239.268 333.426,238.912 316.412,238.912 316.756,239.256 P10.5@316.756,240.112 ; v1(308.7,238.9) 316.4,238.9
"INT0 ACCELEROMETER": P11.6 U3.62 U7.4 | length 66.5
  Top Layer w0.2: U3.62@280.094,265.314 280.094,264.16 280.348,263.906 283.642,263.906 v1(283.87,263.677) ; P11.6@288.92,241.3 288.92,240.603 290.912,238.611 291.487,238.611 291.786,238.312 291.786,237.788 U7.4@291.836,237.738
  Bottom Layer w0.2: v1(283.87,263.677) 283.87,262.534 285.217,261.188 286.893,261.188 290.855,257.226 290.855,253.395 295.4,248.85 303.834,248.85 307.391,245.294 307.391,241.808 307.073,241.491 305.778,241.491 305.765,241.503 289.123,241.503 P11.6@288.92,241.3
"INT1 GYRO": P14.4 U3.63 U8.12 | length 96
  Top Layer w0.2: U3.63@279.594,265.314 279.594,266.742 280.416,267.564 v1(281,267.564) ; v1(283.896,247.599) 283.87,247.574 283.87,228.219 v1(285.013,227.076) ; v1(285,222.5) 285,221.296 P14.4@288.92,217.376 ; U8.12@295.25,216.85 296.049,216.85 v1(296.099,216.8)
  Bottom Layer w0.2: v1(281,267.564) 280.594,267.157 272.263,267.157 270.891,265.786 270.891,261.315 271.183,261.023 273.291,261.023 275.648,258.667 277.23,258.667 280.035,255.862 280.035,254.432 283.921,250.546 286.868,250.546 288.563,248.85 291.649,248.85 291.986,248.514 291.986,247.498 291.49,247.002 284.493,247.002 v1(283.896,247.599) ; v1(285,222.5) 285,223.912 284.912,224 284.912,226.974 v1(285.013,227.076) ; P14.4@288.92,217.376 289.496,216.8 v1(296.099,216.8)